# Altium PCB machnguonxung.PcbDoc
Units mil, origin at the board's own origin, x right, y up, seen from the top; angles counter-clockwise.
Board outline 3300 x 2720 mil, 2 copper layers (Top Layer, Bottom Layer); 30 components, 20 nets, 79 pads, 6 vias.
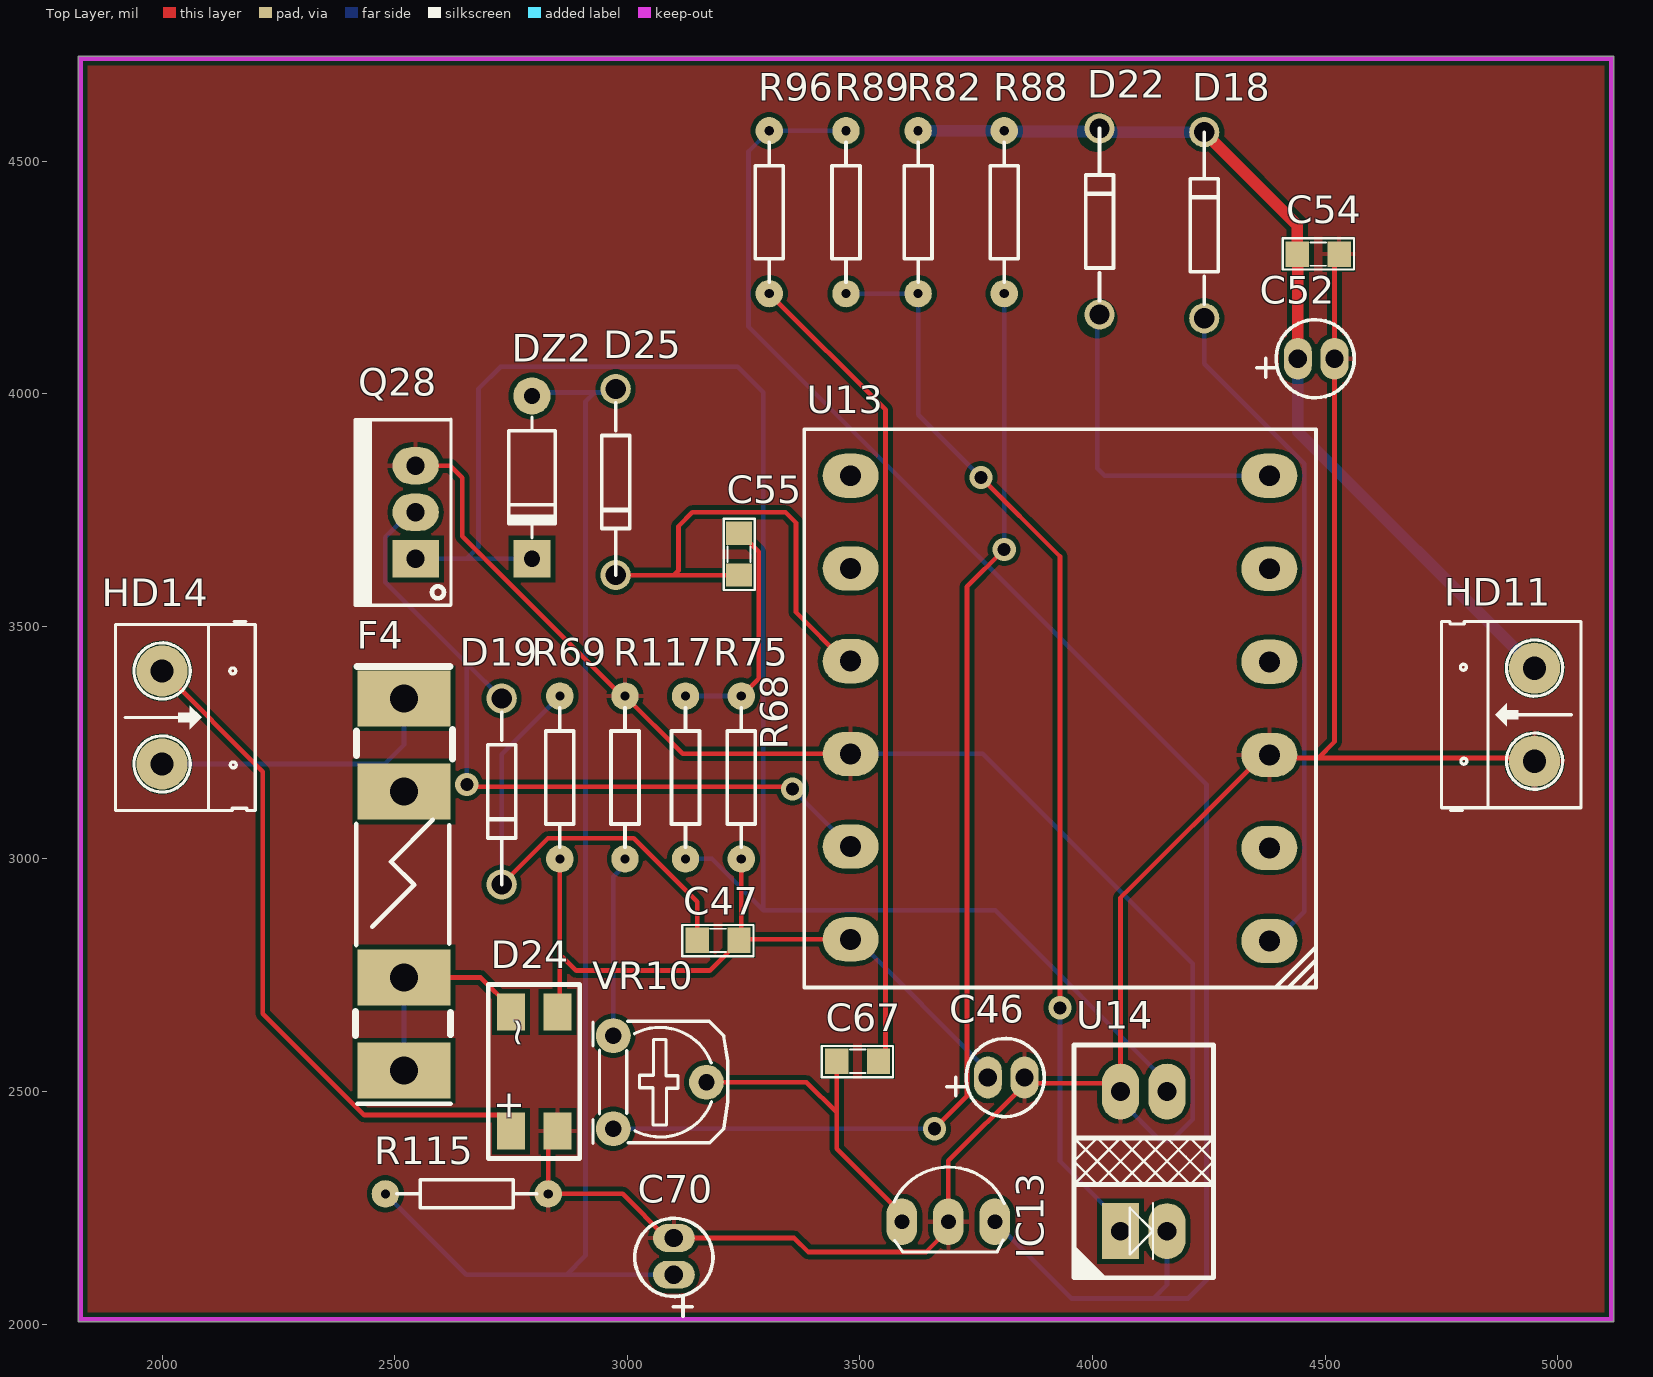
[diagram p0: Top Layer view]
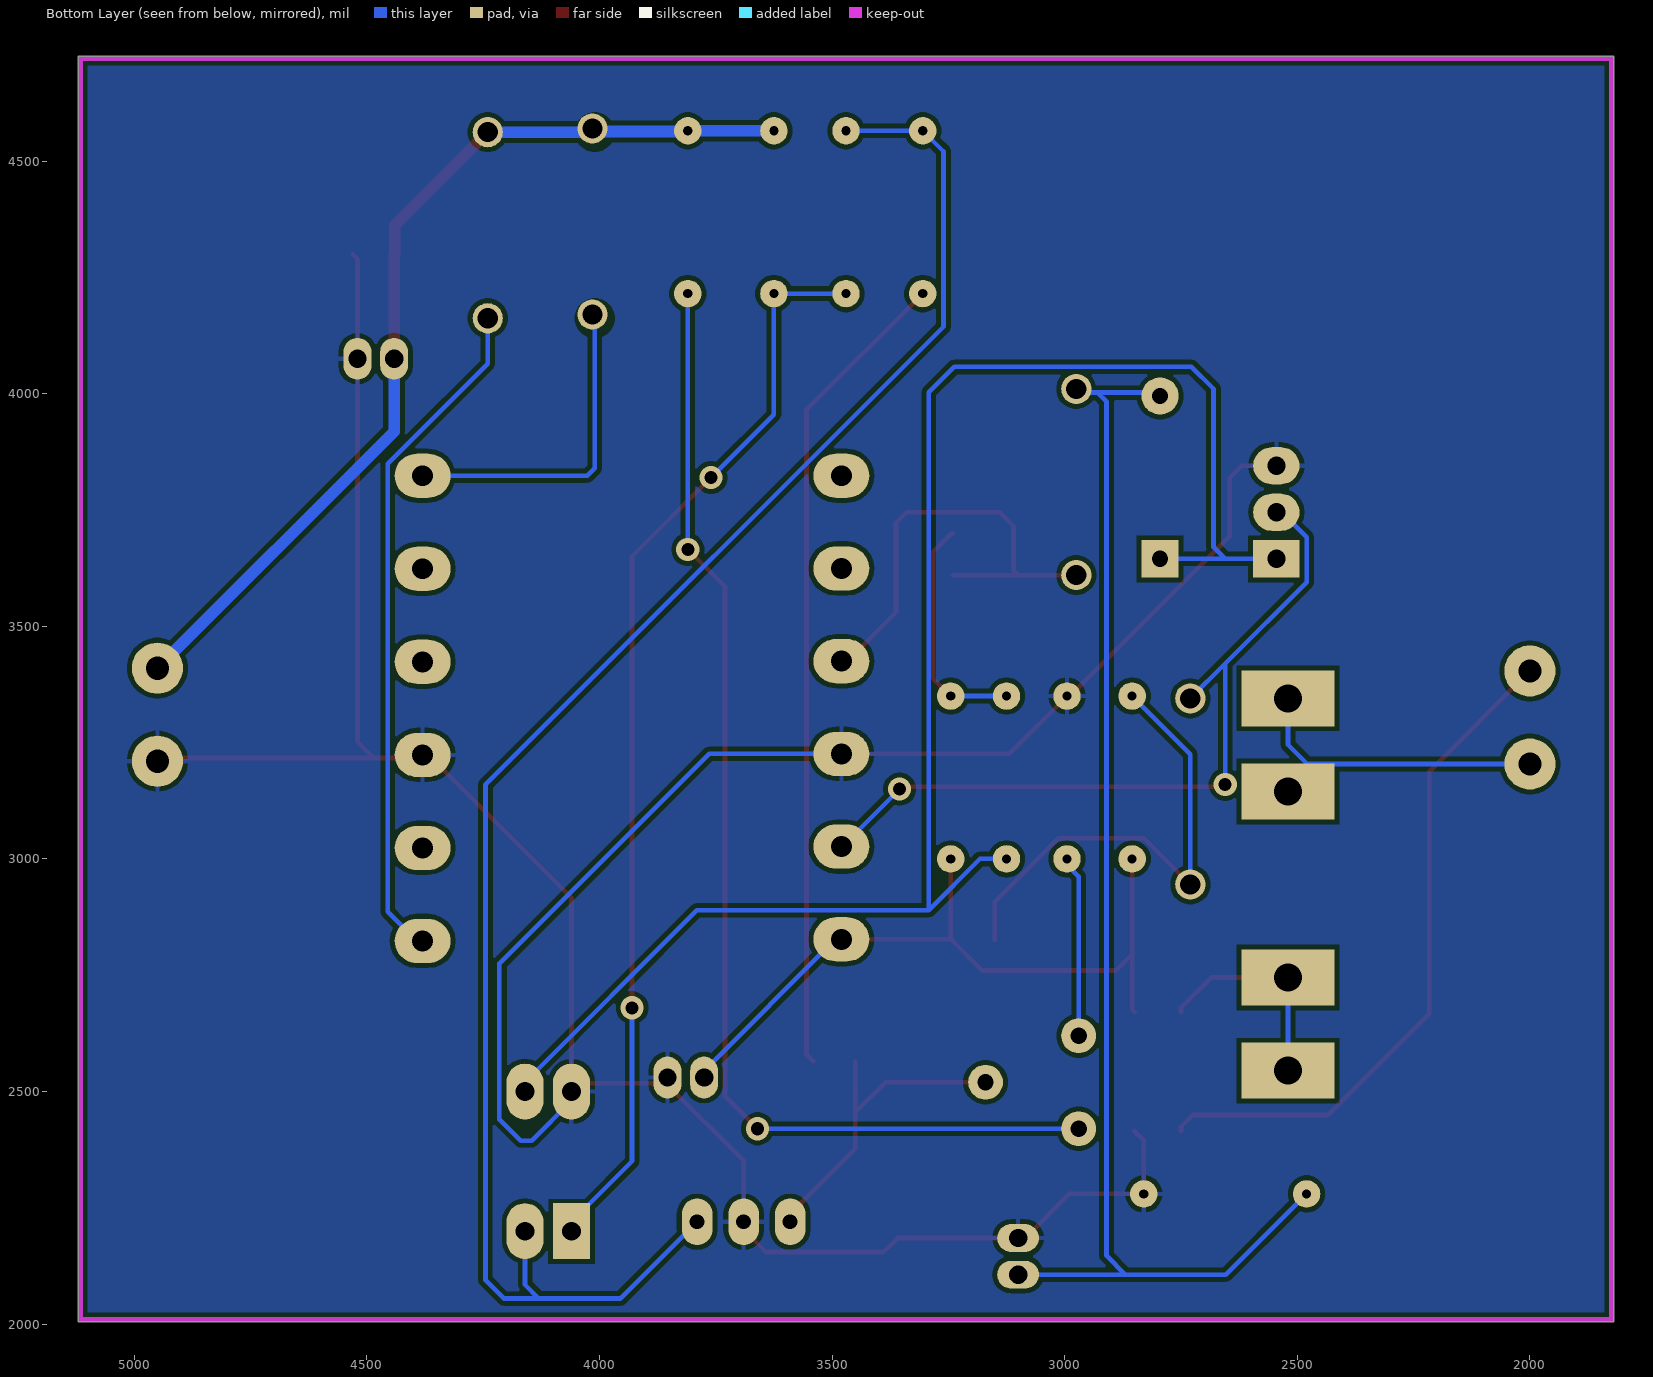
[diagram p1: Bottom Layer view, seen from below]

## Layer stack, top to bottom
Top Solder: solder mask 0.4, Solder Resist, Dk 3.5
Top Layer: signal copper 1.4
Dielectric 1: dielectric 12.6, FR-4, Dk 4.8
Bottom Layer: signal copper 1.4
Bottom Solder: solder mask 0.4, Solder Resist, Dk 3.5

## Board outline
1820,2005 5120,2005 5120,4725 1820,4725

## Design rules (kind name [scope] priority, off if disabled: settings)
Clearance [All] p1: gap=10 ignorepadtopadclearanceinfootprint=FALSE except(0: Arc-Hole Track-Hole SMDPad-Hole THPad-Hole Via-Hole Fill-Hole Poly-Hole Region-Hole Text-Hole)
PolygonConnect [All] p1: connectstyle=Relief reliefconductorwidth=10 reliefentries=4 polygonreliefangle="90 Angle" airgapwidth=10
RoutingVias [All] p1: holewidth=28 width=50 viastyle="Through Hole" minholewidth=28 minwidth=50 maxholewidth=28 maxwidth=50
SolderMaskExpansion [All] p1: expansion=4 istentingtop=FALSE
Width Width_1 [All] p1: maxlimit=10 minlimit=10 preferedwidth=10
Width 12V [All] p2: maxlimit=25 minlimit=15 preferedwidth=20 checkconnectedcopper=TRUE
30 further rules are at their usual default settings.

## Components (designator, comment, footprint, x,y, rotation, side; value= is the part's Value field where it differs from the comment)
C46 "47000uF/400V" CAP10UF 3853.74,2530 r180 top
C47 "222 2KV" SM-0805 3195,2825 r0 top value=103
C52 "470MF/50V" CAP10UF 4520,4075 r180 top
C54 "104" SM-0805 4485,4300 r180 top value=103
C55 "472" SM-0805 3240,3655 r90 top value=103
C67 "104" SM-0805 3495,2565 r0 top value=103
C70 "CAPACI" CAP10UF 3100,2185 r270 top
D18 "1N4007" diode 4240,4362.03 r90 top
D19 "1N4007" diode 2730,3145 r270 top
D22 "1N4007" diode 4015,4370 r90 top
D24 "BRIDGE1" BRIDGE_DAN 2800,2545.91 r270 top
D25 "1N4148" diode 2975,3810 r270 top
DZ2 "12V" D1A 2795,3995 r90 top
F4 "F1A" Fuse 2520,2945 r270 top value=Fuse
HD11 "Header 2" HED2 4950,3210 r90 top
HD14 "AC" HED2 2000,3404 r270 top value="Header 2"
IC13 "TL431" qto-92 3690,2220 r0 top
Q28 "13007" QTO-220 2545,3645 r90 top value=TIP41
R68 "220k 1W" R1/6W 3245,3175 r270 top value="R1/4W - 1K"
R69 "68k 1W" R1/6W 2855,3175 r270 top value="R1/4W - 1K"
R75 "150 1W" R1/6W 3125,3175 r90 top value="R1/4W - 1K"
R82 "2k2" R1/6W 3625,4390 r90 top value="R1/4W - 1K"
R88 "10k" R1/6W 3810,4390 r90 top value="R1/4W - 1K"
R89 "10k" R1/6W 3470,4390 r270 top value="R1/4W - 1K"
R96 "1k2" R1/6W 3305,4390 r90 top value="R1/4W - 1K"
R115 "1k" R1/6W 2655,2280 r180 top value="R1/4W - 1K"
R117 "1k5" R1/6W 2995,3175 r270 top value="R1/4W - 1K"
U13 "Tranf13" BAX_EE32 4380,2823.57 r180 top value="BA xung"
U14 "OPTO" OPTO_U 4260,2200 r180 top value=TLP5211
VR10 "2K" VR 2970,2620 r270 top value="VR 10K"

## Footprints (in the part's own frame and the unit in brackets; to place one, negate y for a bottom-side part, rotate by r counter-clockwise, add the part's x,y. Pads: shape width x height; smd on the part's side, far side on the other; paste and mask are expansions set on the pad)
BAX_EE32 [mil] "EE32"
  oval 120x95 hole 45: 1(0,0) 2(0,-200) 3(0,-400) 4(0,-600) 5(0,-800) 6(0,-1000) 7(900,-1000) 8(900,-800.71) 9(900,-601.43) 10(900,-402.14) 11(900,-202.86) 12(900,-3.57)
  silkscreen extent -100,-1100 1000,100
BRIDGE_DAN [mm]
  rect 2x1.524 smd: 1(-3.175,1.27) 2(3.325,-1.27) 3(-3.175,-1.27) 4(3.325,1.27)
  silkscreen extent -4.67,-2.52 4.82,2.48, body extent -3.34,-2.54 3.34,2.41, height 2.9
CAP10UF [mil]
  oval 60x90 hole 39.37 unplated: 1(78.74,0) 2(0,0)
  silkscreen extent -42,-84 167,84
D1A [mil] "Diode 1A, W 100mil, L 350mil"
  round 80 hole 35: 1(0,0)
  rect 80x80 hole 35: 2(-350,0)
  silkscreen extent -305,-50 -45,50, body extent -386,-33 34,36, height 84
diode [mil] "Diode"
  round 65 hole 43.31: 1(-200,0) 2(200,0)
  silkscreen extent -170,-30 200,30
Fuse [mil] "3A"
  rect 120x200 hole 60: 1(-400,0) 1(-200,0) 2(200,0) 2(400,0)
  silkscreen extent -469,-104 471,104, body extent -335,-100 335,105, height 100
HED2 [mil] "Header 2, 2 pin, hight 300mil, Pin to Pin 200, Colour Green"
  round 110 hole 50: 1(0,0) 2(200,0)
  silkscreen extent -106,-100 300,200, body extent -92,-140 302,155, height 394
OPTO_U [mil] "Opto hinh chu U"
  rect 80x120 hole 40: A(200,0)
  oval 80x120 hole 40: C(100,-300) E(200,-300) K(100,0)
  silkscreen extent 0,-400 300,100, body extent 43,-347 260,47, height 374
qto-92 [mil] "TO-92"
  oval 66x100 hole 32: 1(-100,0) 2(0,0) 3(100,0)
  silkscreen extent -117,-65 120,118, body extent -109,-66 109,95, height 245
QTO-220 [mil] "TO-220 - 1-2-3"
  rect 80x100 hole 39: 1(0,0)
  oval 80x100 hole 39: 2(100,0) 3(200,0)
  silkscreen extent -100,-76 300,130, body extent -121,-85 321,100, height 755
R1/6W [mm]
  round 1.5 hole 0.5: 1(-4.445,0) 2(4.445,0)
  silkscreen extent -3.81,-0.76 3.81,0.76
SM-0805 [mil] "Compoment SMD 80x50mil"
  rect 50x55 smd: 1(-45,0) 2(45,0)
  silkscreen extent -77,-34 76,33, body extent -40,-27 40,23, height 24
VR [mil] "Resistor Variable"
  round 75 hole 35: 1(0,0) 2(100,200) 3(200,0)
  silkscreen extent -31,-44 231,246, body extent -87,-30 307,372, height 165

## Part data
C46 C52 C70: library part "CAPACITOR POL", "Capacitor"
C47 C54 C55 C67: library part CM, "Cap SMD"
D18 D19 D22 D25: library part DIODE, "Diode"
D24: "Diode Bridge"
DZ2: library part "Diode Zener", "Diode  Zener"
F4: library part Fuse, "Fuse", Designed by=VanDungEvn
HD11 HD14: library part Hed2, "Header 2 (Green)"
IC13: "Programmable Shunt Regulator"
Q28: library part NPN_BCE, "P 1W, BCE"
R68 R69 R75 R82 R88 R89 R96 R115 R117: library part Res, "Resistor 1/4W"
U13: library part BAX_EE32, "Tranformer"
U14: library part OPTO_U, "Single Opto"
VR10: library part VR, "Var Resistor"

## Via types
v1: diameter 50, hole 28, Top Layer to Bottom Layer, 6 vias

## Nets (pads, with @x,y where several pads share a name; then routed paths per layer and width w, separated by ;. In a path a pad name is that pad's centre, name@x,y a point inside that pad or via, vN(x,y) a via of type N, cw(c..) or ccw(c..) an arc to the next point about the centre after c; other vN are vias at no path point)
12V: C52.1 C54.2 D18.2 D22.2 HD11.2 R82.2 R88.2 | length 2062.4
  Top Layer w10: C54.2 C54.2@4441.26,4298.74
  Top Layer w25: D18.2 4440,4362.03 C54.2 ; C52.1 C54.2@4441.26,4298.74
  Bottom Layer w10: R88.2 R88.2@3811.49,4563.51 ; D22.2@4013.51,4571.49 D22.2
  Bottom Layer w25: R82.2 R88.2 ; R88.2@3811.49,4563.51 D22.2@4008.51,4563.51 ; D22.2@4010,4562.03 D18.2 ; C52.1 4441.26,3918.74 HD11.2
GND: C46.2 C52.2 C54.1 C70.2 D24.4 HD11.1 IC13.2 Q28.3 R115.1 R117.1 U13.3 U13.10 U14.E | length 6980.6
  Top Layer w10: Q28.3 2619.14,3845 2645,3819.14 2645,3693.79 2988.79,3350 R117.1 3119.29,3225.71 U13.10 ; D24.4 2830,2395 R115.1 2990,2280 3085,2185 C70.2 3358.99,2185 3388.99,2155 3642,2155 3690,2203 IC13.2 3690,2351.26 3853.74,2515 C46.2 3866.24,2517.5 4042.5,2517.5 U14.E 4060,2916.07 4367.5,3223.57 U13.3 4386.79,3216.79 4485,3216.79 ; C54.1 4520,4290 C52.2 4520,3251.79 4485,3216.79 ; HD11.1 4943.21,3216.79 4485,3216.79
  Bottom Layer w10: U13.10 3764.29,3225.71 4215,2775 4215,2440 4169.14,2394.14 4145.86,2394.14 4060,2480 U14.E
NetC46_1: C46.1 C47.2 D24.1 R68.2 R69.2 U13.12 | length 1598.7
  Top Layer w10: D24.1 2855,2675.91 2855,2790 ; R69.2 2855,2790 ; R68.2 3245,2830 C47.2@3242.14,2827.14 ; U13.12 C47.2@3242.14,2827.14 ; 2855,2790 2860,2790 2890,2760 3177.5,2760 3240,2822.5 C47.2 C47.2@3242.14,2827.14
  Bottom Layer w10: U13.12 3492.68,2827.14 3775,2544.82 C46.1
NetC47_1: C47.1 D19.2 R69.1 | length 1057.5
  Top Layer w10: D19.2 2829.53,3044.53 3013.44,3044.53 3150,2907.97 C47.1
  Bottom Layer w10: D19.2 2730,3225 R69.1
NetC55_1: C55.1 D25.2 U13.9 | length 1001.9
  Top Layer w10: D25.2 3100,3610 ; C55.1 3100,3610 ; U13.9 3467.5,3425 3362.47,3530.03 3362.47,3722.53 3340,3745 3140,3745 3110,3715 3110,3620 3100,3610
NetC55_2: C55.2 R68.1 R75.2 | length 504.6
  Top Layer w10: C55.2 3242.5,3700 3282.5,3660 3282.5,3387.5 R68.1
  Bottom Layer w10: R75.2 R68.1
NetC67_1: C67.1 IC13.1 VR10.2 | length 709.9
  Top Layer w10: VR10.2 3385,2520 3450,2455 ; C67.1 3450,2455 ; IC13.1 3590,2237 3450,2377 3450,2455
NetC67_2: C67.2 R96.1 | length 1759.8
  Top Layer w10: R96.1 3555,3965 3555,2580 C67.2
NetC70_1: C70.1 D25.1 DZ2.1 R115.2 | length 2799.5
  Bottom Layer w10: R115.2 2653.74,2106.26 2869.37,2106.26 ; DZ2.1 2802.5,4002.5 2930,4002.5 ; D25.1 2967.5,4002.5 2930,4002.5 ; C70.1 2869.37,2106.26 ; 2869.37,2106.26 2910,2146.89 2910,3982.5 2930,4002.5
NetD18_1: D18.1 U13.1 | length 1465.9
  Bottom Layer w10: D18.1 4240,4064.46 4455,3849.46 4455,2886.07 4392.5,2823.57 U13.1
NetD19_1: D19.1 Q28.2 U13.11 | length 1677.4
  Top Layer w10: v1(2655,3160) 2660,3155 3350,3155 v1(3355,3150)
  Bottom Layer w10: Q28.2 2533.79,3745 2480,3691.21 2480,3595 2655,3420 ; v1(2655,3160) 2655,3420 ; D19.1 2655,3420 ; v1(3355,3150) 3478.57,3026.43 U13.11
NetD22_1: D22.1 U13.6 | length 698.8
  Bottom Layer w10: D22.1@4010,4162.03 4010,3840 4026.43,3823.57 U13.6
NetD24_2: D24.2 HD14.1 | length 1469.9
  Top Layer w10: HD14.1 2216.46,3187.54 2216.46,2667.33 2434.42,2449.37 2725,2449.37 2750,2424.37 D24.2
NetD24_3: D24.3 F4.2 | length 466.2
  Top Layer w10: F4.2@2520,2745 2685.28,2745 2750,2680.28 D24.3
  Bottom Layer w10: F4.2@2520,2545 F4.2@2520,2745
NetDZ2_2: DZ2.2 Q28.1 R75.1 U14.C | length 3646.9
  Bottom Layer w10: Q28.1 2655,3645 ; DZ2.2 2655,3645 ; R75.1 3182.03,3000 3292.39,2889.64 ; U14.C 4160,2520 3790.36,2889.64 3292.39,2889.64 ; 2655,3645 2680,3670 2680,4010 2727.5,4057.5 3237.5,4057.5 3292.39,4002.61 3292.39,2889.64
NetF4_1: F4.1 HD14.2 | length 637
  Bottom Layer w10: HD14.2 2479,3204 2520,3245 F4.1@2520,3345
NetIC13_3: IC13.3 R89.1 R96.2 U14.K | length 3759.7
  Bottom Layer w10: R89.1 R96.2 3260.47,4520.47 3260.47,4143.99 4245,3159.46 4245,2095 4205,2055 4130,2055 ; IC13.3 3790,2218.15 3815.87,2192.28 3817.72,2192.28 3955,2055 4130,2055 ; U14.K 4160,2085 4130,2055
NetR82_1: R82.1 R89.2 U14.A | length 2350.2
  Top Layer w10: v1(3760,3820) 3930,3650 v1(3930,2680)
  Bottom Layer w10: R89.2 R82.1 3625,3955 v1(3760,3820) ; v1(3930,2680) 3930,2350 4060,2220 U14.A
NetR88_1: R88.1 VR10.3 | length 2547.1
  Top Layer w10: v1(3660,2420) 3730,2490 3730,3585 v1(3810,3665)
  Bottom Layer w10: VR10.3 v1(3660,2420) ; v1(3810,3665) R88.1
NetR117_2: R117.2 VR10.1 | length 390.4
  Bottom Layer w10: VR10.1 2970,2962.03 2995,2987.03 R117.2
pads on no net: U13.2 U13.4 U13.5 U13.7 U13.8

## Polygon pours and split planes (outlines as drawn)
GND on Bottom Layer "GND_L02_P001" (solid, pour order 1): 1825,4720 5115,4720 5115,2010 1825,2010
GND on Top Layer "GND_L01_P000" (solid, pour order 0): 1825,4720 5115,4720 5115,2010 1825,2010

## Keep-outs
Keep-Out Layer:
  lines w10: 5115,2010 1825,2010 1825,4720 5115,4720 5115,2010 ; 5115,2010 5115,2010

## Text inside footprints (layer, text, board x,y; h text height)
D24: Top Overlay "+" at 2720.47,2503.58 h60 r270; Top Overlay "~" at 2740.16,2661.06 h60 r270